# EAGLE board 13767_LiPoChargerBooster5V1A-panel_v10 (EAGLE 7.5.0), part 1 of 4
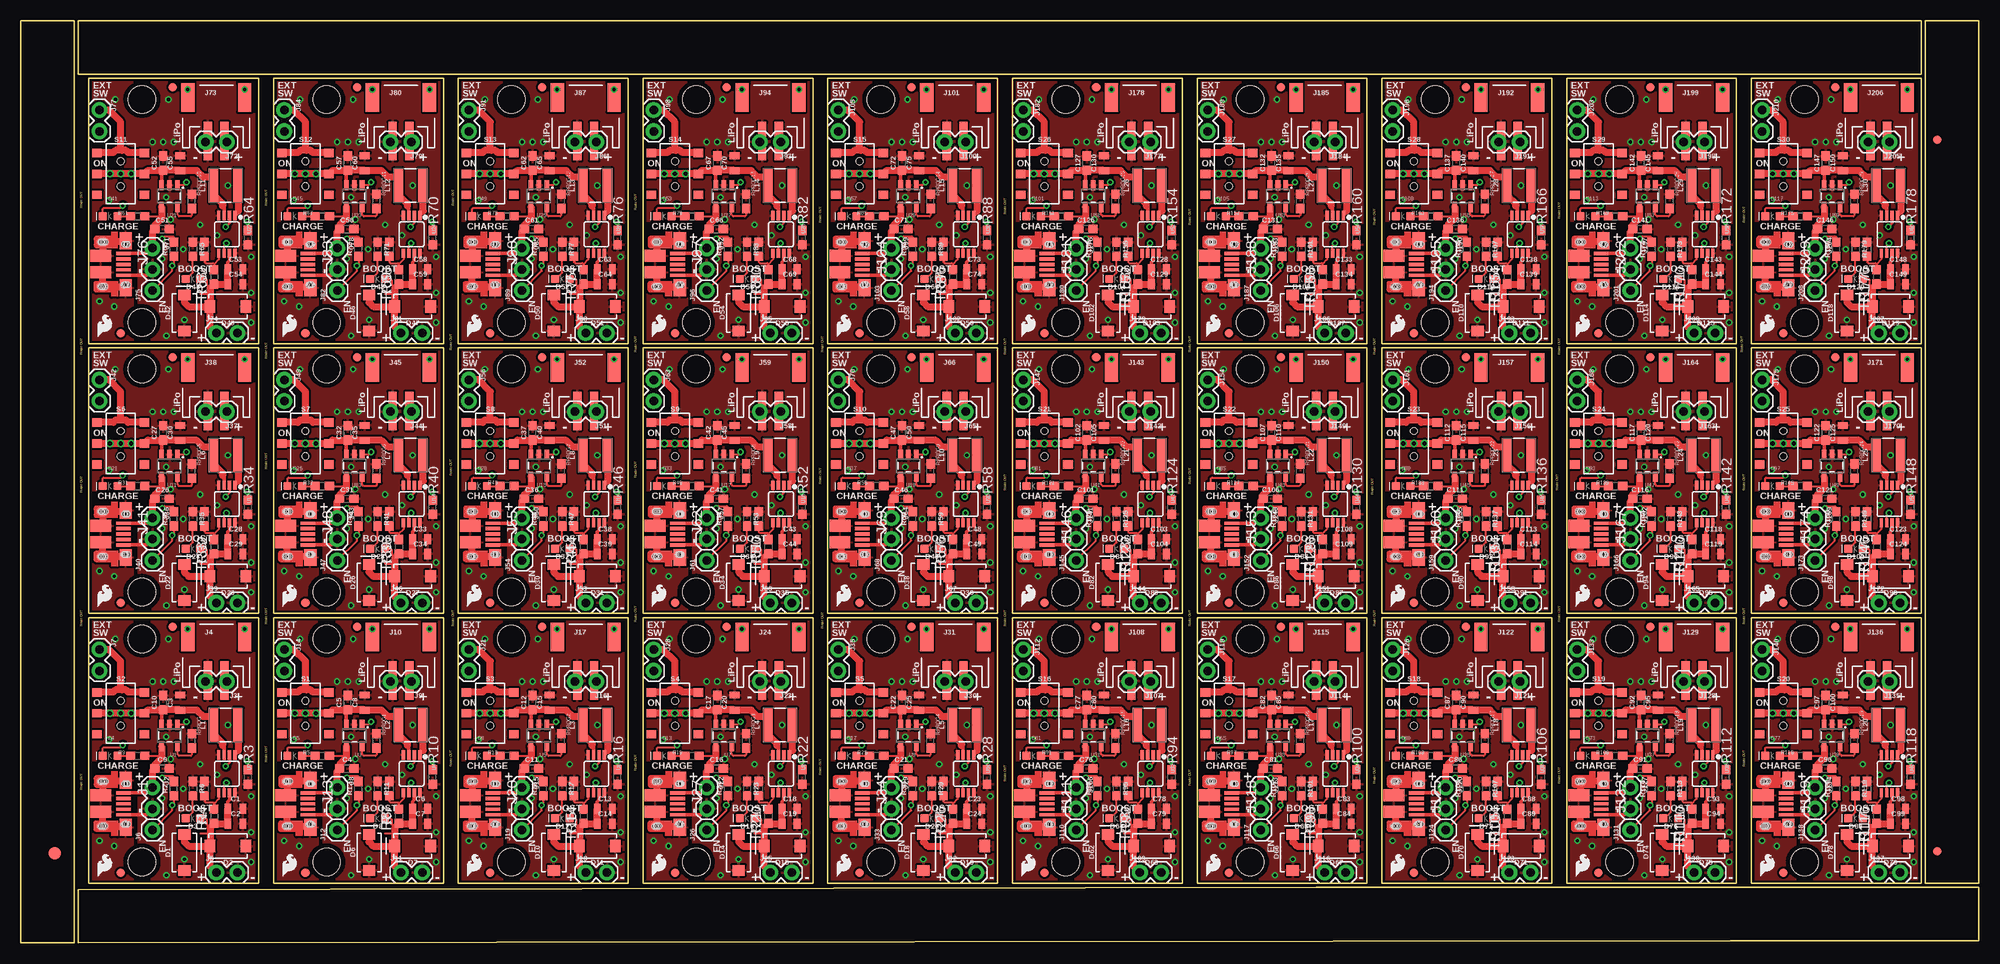
[diagram p0: board, top side]
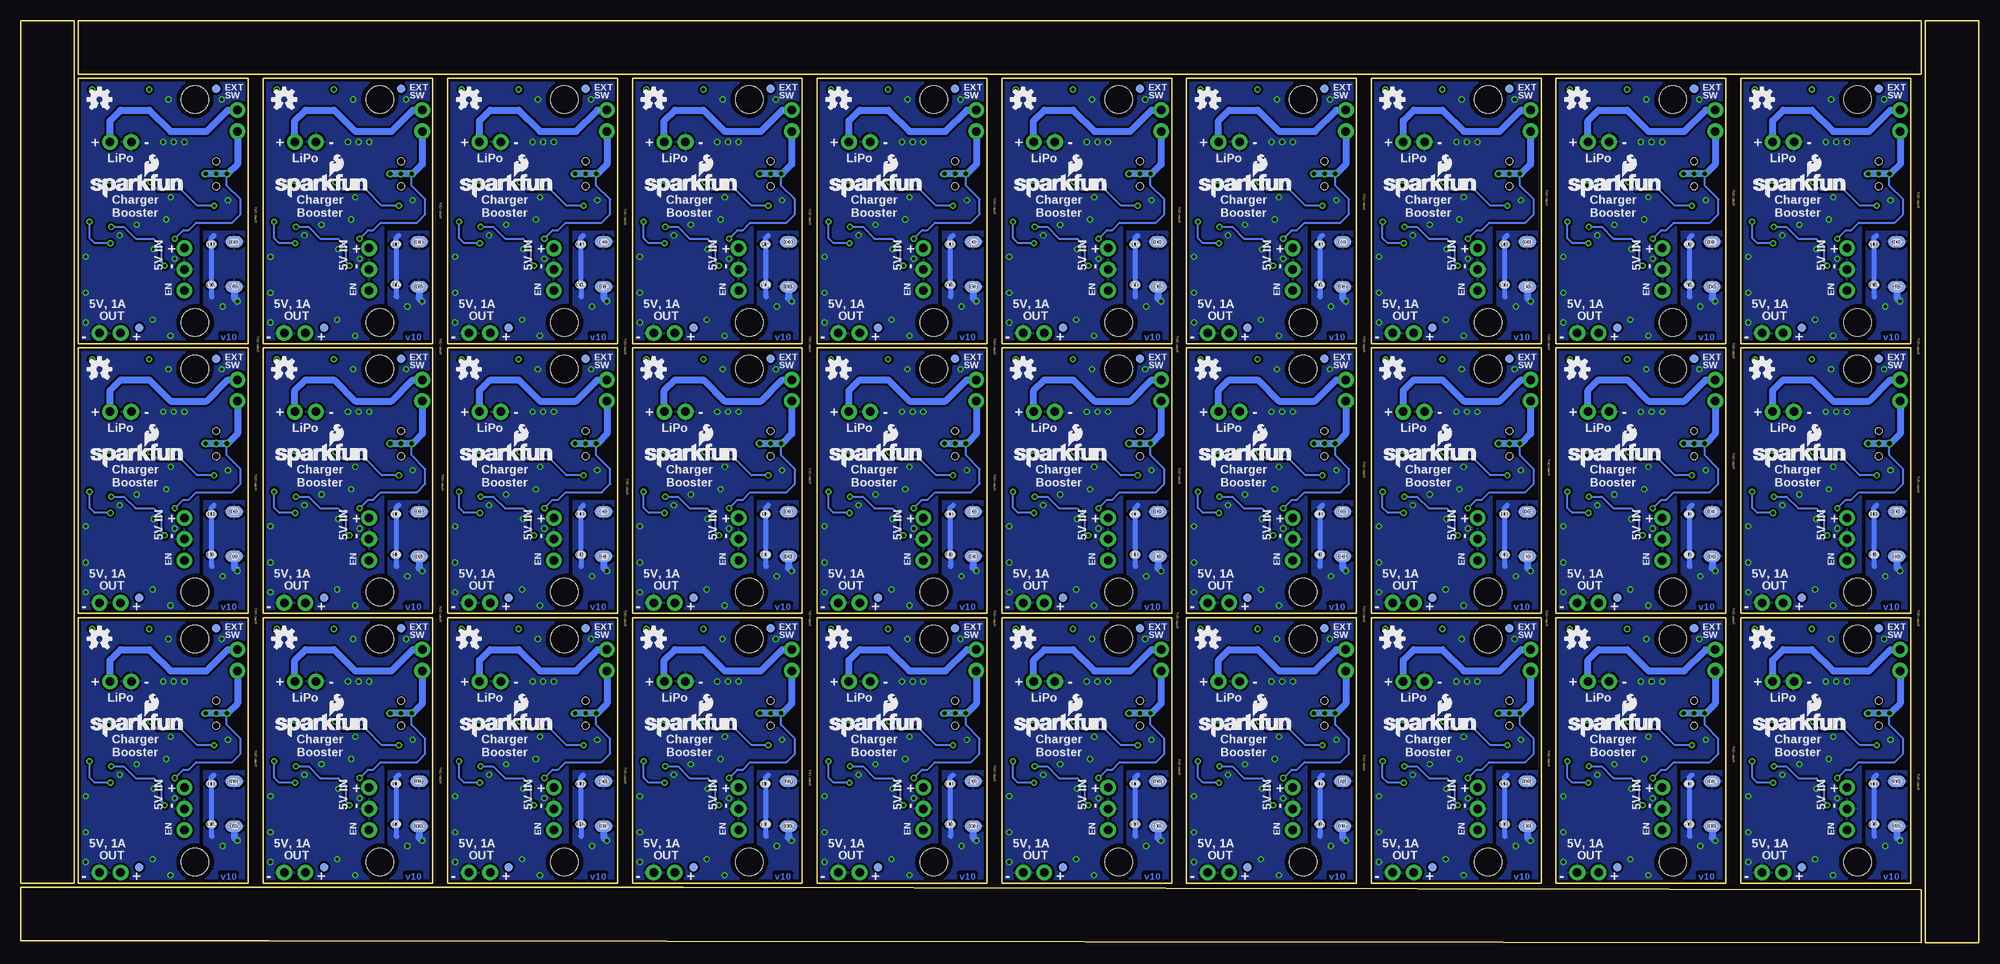
[diagram p1: board, bottom side, seen from below]

Size 234.19 x 110.24 mm. Coordinates in mm from the lower left corner, seen from the top.
Outline: 0,30.99 0,110.24 6.35,110.24 6.35,80.52
Outline: 6.35,83.06 6.35,0 0,0 0,33.53
Outline: 72.39,103.89 6.86,103.89 6.86,110.24 22.86,110.24
Outline: 20.32,110.24 227.33,110.24 227.33,103.89 69.85,103.89
Outline: 234.19,79.5 234.19,7.11 227.84,7.11 227.84,29.97
Outline: 227.84,27.43 227.84,110.24 234.19,110.24 234.19,76.96
Outline: 154.94,6.6 234.19,6.6 234.19,0.25 204.47,0.25
Outline: 207.01,0.25 6.86,0 6.86,6.35 157.48,6.6
Outline: 8.13,7.11 28.45,7.11 28.45,38.86 8.13,38.86 8.13,7.11
Outline: 30.23,7.11 50.55,7.11 50.55,38.86 30.23,38.86 30.23,7.11
Outline: 52.32,7.11 72.64,7.11 72.64,38.86 52.32,38.86 52.32,7.11
Outline: 74.42,7.11 94.74,7.11 94.74,38.86 74.42,38.86 74.42,7.11
Outline: 96.52,7.11 116.84,7.11 116.84,38.86 96.52,38.86 96.52,7.11
Outline: 8.13,39.37 28.45,39.37 28.45,71.12 8.13,71.12 8.13,39.37
Outline: 30.23,39.37 50.55,39.37 50.55,71.12 30.23,71.12 30.23,39.37
Outline: 52.32,39.37 72.64,39.37 72.64,71.12 52.32,71.12 52.32,39.37
Outline: 74.42,39.37 94.74,39.37 94.74,71.12 74.42,71.12 74.42,39.37
Outline: 96.52,39.37 116.84,39.37 116.84,71.12 96.52,71.12 96.52,39.37
Outline: 8.13,71.63 28.45,71.63 28.45,103.38 8.13,103.38 8.13,71.63
Outline: 30.23,71.63 50.55,71.63 50.55,103.38 30.23,103.38 30.23,71.63
Outline: 52.32,71.63 72.64,71.63 72.64,103.38 52.32,103.38 52.32,71.63
Outline: 74.42,71.63 94.74,71.63 94.74,103.38 74.42,103.38 74.42,71.63
Outline: 96.52,71.63 116.84,71.63 116.84,103.38 96.52,103.38 96.52,71.63
Outline: 118.62,7.11 138.94,7.11 138.94,38.86 118.62,38.86 118.62,7.11
Outline: 140.72,7.11 161.04,7.11 161.04,38.86 140.72,38.86 140.72,7.11
Outline: 162.81,7.11 183.13,7.11 183.13,38.86 162.81,38.86 162.81,7.11
Outline: 184.91,7.11 205.23,7.11 205.23,38.86 184.91,38.86 184.91,7.11
Outline: 207.01,7.11 227.33,7.11 227.33,38.86 207.01,38.86 207.01,7.11
Outline: 118.62,39.37 138.94,39.37 138.94,71.12 118.62,71.12 118.62,39.37
Outline: 140.72,39.37 161.04,39.37 161.04,71.12 140.72,71.12 140.72,39.37
Outline: 162.81,39.37 183.13,39.37 183.13,71.12 162.81,71.12 162.81,39.37
Outline: 184.91,39.37 205.23,39.37 205.23,71.12 184.91,71.12 184.91,39.37
Outline: 207.01,39.37 227.33,39.37 227.33,71.12 207.01,71.12 207.01,39.37
Outline: 118.62,71.63 138.94,71.63 138.94,103.38 118.62,103.38 118.62,71.63
Outline: 140.72,71.63 161.04,71.63 161.04,103.38 140.72,103.38 140.72,71.63
Outline: 162.81,71.63 183.13,71.63 183.13,103.38 162.81,103.38 162.81,71.63
Outline: 184.91,71.63 205.23,71.63 205.23,103.38 184.91,103.38 184.91,71.63
Outline: 207.01,71.63 227.33,71.63 227.33,103.38 207.01,103.38 207.01,71.63
Copper layers (1*16): Top 0.035mm / dielectric 1.5mm / Bottom 0.035mm
Design rules "SparkFun-2-layer-TIGHT": minimum track width 7mil, minimum drill 15mil, track to track 7mil, track to pad 7mil, pad to pad 7mil, via to via 7mil, smd to smd 7mil, copper to edge 7mil, drill to drill 7mil, minimum pad ring 7mil, minimum via ring 7mil, stop-mask expansion 4mil, vias tented up to drill 25mil, thermal gap 10mil
Net classes: 0 default: width 0.152 mm, drill 0.305 mm, clearance 0.152 mm

## Footprints (pad centres in the part's own frame; a part is rotated, then mirrored left to right if it is on the bottom)
0805 = smd 0.8 x 1.2: 1 -0.9,0; 2 0.9,0
0603 = smd 1.1 x 1: 1 -0.85,0; 2 0.85,0
SMA-DIODE = smd 1.27 x 1.47: A -2.15,0; C 2.15,0
LED-0603 = smd 1 x 1: A -0.877,0; C 0.877,0
FIDUCIAL-1.5X3 = smd 1.5 x 1.5: 1 0,0
FIDUCIAL-1X2 = smd 1 x 1: 1 0,0
USB-MICROB-PTH = smd 0.4 x 1.75: D+ 0.031,1.331; D- -0.619,1.331; GND 1.331,1.331; ID 0.681,1.331; VBUS -1.269,1.331 | smd 1.4 x 2.1 bottom: P$1 2.701,-1.142; P$3 -2.659,-1.144 | smd 1 x 1.3: P$2 2.487,1.594; P$6 -2.368,1.604 | smd 1 x 1.3 bottom: P$4 -2.368,1.604; P$10 2.481,1.598 | smd 1.1 x 1.5: P$8 2.701,-1.142; P$12 -2.659,-1.144 | smd 2 x 1.46: SHEILD2 2.831,1.606; SHIELD -2.794,1.606 | smd 1.425 x 2.5: SHIELD3 -0.979,-1.349; SHIELD4 0.996,-1.352 | hole 0.66: -2.659,-0.879; 2.477,1.821; 2.461,1.666; 2.481,1.426; 2.467,1.536; -2.659,-1.059; -2.659,-1.219; -2.649,-1.349; 2.701,-0.899; 2.701,-1.079; 2.701,-1.239; 2.711,-1.369; -2.369,1.821; -2.359,1.691; -2.369,1.541; -2.364,1.432
1X02 = drill 1.016 pad 1.88: 1 0,0; 2 2.54,0
JST-2-SMD = smd 1 x 4.6: 1 -1,-3.7; 2 1,-3.7 | smd 1.6 x 3.4: NC1 -3.4,1.5; NC2 3.4,1.5
1X01 = drill 1.016 pad 1.88: 1 0,0
STAND-OFF = hole 3.302: 0,0
INDUCTOR_4X4MM = smd 4.089 x 1.143: P$1 0,1.473; P$2 0,-1.473
SWITCH_DPDT_SMD_AYZ0202 = smd 1 x 1.15: 1 -2.5,2.825; 2 0,2.825; 3 2.5,2.825; 4 -2.5,-2.825; 5 0,-2.825; 6 2.5,-2.825 | hole 0.85: 1.5,0; -1.5,0
PAD.03X.03 = smd 0.762 x 0.762: P$1 0,0
SOT23-5 = smd 0.55 x 1.2: 1 -0.95,-1.3; 2 0,-1.3; 3 0.95,-1.3; 4 0.95,1.3; 5 -0.95,1.3
MSOP8 = smd 0.4 x 1.1: 1 -0.975,-2.25; 2 -0.325,-2.25; 3 0.325,-2.25; 4 0.975,-2.25; 5 0.975,2.25; 6 0.325,2.25; 7 -0.325,2.25; 8 -0.975,2.25

## Placement (x,y rotation side)
C1  22uF  [0805]  25.65,16 0 top
C2  22uF  [0805]  25.65,14.22 0 top
C3  22uF  [0805]  19.05,28.7 90 top
C4  4.7uF  [0603]  38.99,20.83 0 top
C5  4.7uF  [0603]  39.12,28.7 90 top
C6  22uF  [0805]  47.75,16 0 top
C7  22uF  [0805]  47.75,14.22 0 top
C8  22uF  [0805]  41.15,28.7 90 top
C9  4.7uF  [0603]  16.89,20.83 0 top
C10  4.7uF  [0603]  17.02,28.7 90 top
C11  4.7uF  [0603]  61.09,20.83 0 top
C12  4.7uF  [0603]  61.21,28.7 90 top
C13  22uF  [0805]  69.85,16 0 top
C14  22uF  [0805]  69.85,14.22 0 top
C15  22uF  [0805]  63.25,28.7 90 top
C16  4.7uF  [0603]  83.19,20.83 0 top
C17  4.7uF  [0603]  83.31,28.7 90 top
C18  22uF  [0805]  91.95,16 0 top
C19  22uF  [0805]  91.95,14.22 0 top
C20  22uF  [0805]  85.34,28.7 90 top
C21  4.7uF  [0603]  105.28,20.83 0 top
C22  4.7uF  [0603]  105.41,28.7 90 top
C23  22uF  [0805]  114.05,16 0 top
C24  22uF  [0805]  114.05,14.22 0 top
C25  22uF  [0805]  107.44,28.7 90 top
C26  4.7uF  [0603]  16.89,53.09 0 top
C27  4.7uF  [0603]  17.02,60.96 90 top
C28  22uF  [0805]  25.65,48.26 0 top
C29  22uF  [0805]  25.65,46.48 0 top
C30  22uF  [0805]  19.05,60.96 90 top
C31  4.7uF  [0603]  38.99,53.09 0 top
C32  4.7uF  [0603]  39.12,60.96 90 top
C33  22uF  [0805]  47.75,48.26 0 top
C34  22uF  [0805]  47.75,46.48 0 top
C35  22uF  [0805]  41.15,60.96 90 top
C36  4.7uF  [0603]  61.09,53.09 0 top
C37  4.7uF  [0603]  61.21,60.96 90 top
C38  22uF  [0805]  69.85,48.26 0 top
C39  22uF  [0805]  69.85,46.48 0 top
C40  22uF  [0805]  63.25,60.96 90 top
C41  4.7uF  [0603]  83.19,53.09 0 top
C42  4.7uF  [0603]  83.31,60.96 90 top
C43  22uF  [0805]  91.95,48.26 0 top
C44  22uF  [0805]  91.95,46.48 0 top
C45  22uF  [0805]  85.34,60.96 90 top
C46  4.7uF  [0603]  105.28,53.09 0 top
C47  4.7uF  [0603]  105.41,60.96 90 top
C48  22uF  [0805]  114.05,48.26 0 top
C49  22uF  [0805]  114.05,46.48 0 top
C50  22uF  [0805]  107.44,60.96 90 top
C51  4.7uF  [0603]  16.89,85.34 0 top
C52  4.7uF  [0603]  17.02,93.22 90 top
C53  22uF  [0805]  25.65,80.52 0 top
C54  22uF  [0805]  25.65,78.74 0 top
C55  22uF  [0805]  19.05,93.22 90 top
C56  4.7uF  [0603]  38.99,85.34 0 top
C57  4.7uF  [0603]  39.12,93.22 90 top
C58  22uF  [0805]  47.75,80.52 0 top
C59  22uF  [0805]  47.75,78.74 0 top
C60  22uF  [0805]  41.15,93.22 90 top
C61  4.7uF  [0603]  61.09,85.34 0 top
C62  4.7uF  [0603]  61.21,93.22 90 top
C63  22uF  [0805]  69.85,80.52 0 top
C64  22uF  [0805]  69.85,78.74 0 top
C65  22uF  [0805]  63.25,93.22 90 top
C66  4.7uF  [0603]  83.19,85.34 0 top
C67  4.7uF  [0603]  83.31,93.22 90 top
C68  22uF  [0805]  91.95,80.52 0 top
C69  22uF  [0805]  91.95,78.74 0 top
C70  22uF  [0805]  85.34,93.22 90 top
C71  4.7uF  [0603]  105.28,85.34 0 top
C72  4.7uF  [0603]  105.41,93.22 90 top
C73  22uF  [0805]  114.05,80.52 0 top
C74  22uF  [0805]  114.05,78.74 0 top
C75  22uF  [0805]  107.44,93.22 90 top
C76  4.7uF  [0603]  127.38,20.83 0 top
C77  4.7uF  [0603]  127.51,28.7 90 top
C78  22uF  [0805]  136.14,16 0 top
C79  22uF  [0805]  136.14,14.22 0 top
C80  22uF  [0805]  129.54,28.7 90 top
C81  4.7uF  [0603]  149.48,20.83 0 top
C82  4.7uF  [0603]  149.61,28.7 90 top
C83  22uF  [0805]  158.24,16 0 top
C84  22uF  [0805]  158.24,14.22 0 top
C85  22uF  [0805]  151.64,28.7 90 top
C86  4.7uF  [0603]  171.58,20.83 0 top
C87  4.7uF  [0603]  171.7,28.7 90 top
C88  22uF  [0805]  180.34,16 0 top
C89  22uF  [0805]  180.34,14.22 0 top
C90  22uF  [0805]  173.74,28.7 90 top
C91  4.7uF  [0603]  193.68,20.83 0 top
C92  4.7uF  [0603]  193.8,28.7 90 top
C93  22uF  [0805]  202.44,16 0 top
C94  22uF  [0805]  202.44,14.22 0 top
C95  22uF  [0805]  195.83,28.7 90 top
C96  4.7uF  [0603]  215.77,20.83 0 top
C97  4.7uF  [0603]  215.9,28.7 90 top
C98  22uF  [0805]  224.54,16 0 top
C99  22uF  [0805]  224.54,14.22 0 top
C100  22uF  [0805]  217.93,28.7 90 top
C101  4.7uF  [0603]  127.38,53.09 0 top
C102  4.7uF  [0603]  127.51,60.96 90 top
C103  22uF  [0805]  136.14,48.26 0 top
C104  22uF  [0805]  136.14,46.48 0 top
C105  22uF  [0805]  129.54,60.96 90 top
C106  4.7uF  [0603]  149.48,53.09 0 top
C107  4.7uF  [0603]  149.61,60.96 90 top
C108  22uF  [0805]  158.24,48.26 0 top
C109  22uF  [0805]  158.24,46.48 0 top
C110  22uF  [0805]  151.64,60.96 90 top
C111  4.7uF  [0603]  171.58,53.09 0 top
C112  4.7uF  [0603]  171.7,60.96 90 top
C113  22uF  [0805]  180.34,48.26 0 top
C114  22uF  [0805]  180.34,46.48 0 top
C115  22uF  [0805]  173.74,60.96 90 top
C116  4.7uF  [0603]  193.68,53.09 0 top
C117  4.7uF  [0603]  193.8,60.96 90 top
C118  22uF  [0805]  202.44,48.26 0 top
C119  22uF  [0805]  202.44,46.48 0 top
C120  22uF  [0805]  195.83,60.96 90 top
C121  4.7uF  [0603]  215.77,53.09 0 top
C122  4.7uF  [0603]  215.9,60.96 90 top
C123  22uF  [0805]  224.54,48.26 0 top
C124  22uF  [0805]  224.54,46.48 0 top
C125  22uF  [0805]  217.93,60.96 90 top
C126  4.7uF  [0603]  127.38,85.34 0 top
C127  4.7uF  [0603]  127.51,93.22 90 top
C128  22uF  [0805]  136.14,80.52 0 top
C129  22uF  [0805]  136.14,78.74 0 top
C130  22uF  [0805]  129.54,93.22 90 top
C131  4.7uF  [0603]  149.48,85.34 0 top
C132  4.7uF  [0603]  149.61,93.22 90 top
C133  22uF  [0805]  158.24,80.52 0 top
C134  22uF  [0805]  158.24,78.74 0 top
C135  22uF  [0805]  151.64,93.22 90 top
C136  4.7uF  [0603]  171.58,85.34 0 top
C137  4.7uF  [0603]  171.7,93.22 90 top
C138  22uF  [0805]  180.34,80.52 0 top
C139  22uF  [0805]  180.34,78.74 0 top
C140  22uF  [0805]  173.74,93.22 90 top
C141  4.7uF  [0603]  193.68,85.34 0 top
C142  4.7uF  [0603]  193.8,93.22 90 top
C143  22uF  [0805]  202.44,80.52 0 top
C144  22uF  [0805]  202.44,78.74 0 top
C145  22uF  [0805]  195.83,93.22 90 top
C146  4.7uF  [0603]  215.77,85.34 0 top
C147  4.7uF  [0603]  215.9,93.22 90 top
C148  22uF  [0805]  224.54,80.52 0 top
C149  22uF  [0805]  224.54,78.74 0 top
C150  22uF  [0805]  217.93,93.22 90 top
D1  3A/40V/500mV  [SMA-DIODE]  19.56,10.79 90 top
D2  3A/40V/500mV  [SMA-DIODE]  24.77,11.56 180 top
D3  RED  [LED-0603]  20.57,14.86 180 top
D4  BLUE  [LED-0603]  10.67,22.35 180 top
D5  BLUE  [LED-0603]  32.77,22.35 180 top
D6  3A/40V/500mV  [SMA-DIODE]  41.66,10.79 90 top
D7  3A/40V/500mV  [SMA-DIODE]  46.86,11.56 180 top
D8  RED  [LED-0603]  42.67,14.86 180 top
D9  BLUE  [LED-0603]  54.86,22.35 180 top
D10  3A/40V/500mV  [SMA-DIODE]  63.75,10.79 90 top
D11  3A/40V/500mV  [SMA-DIODE]  68.96,11.56 180 top
D12  RED  [LED-0603]  64.77,14.86 180 top
D13  BLUE  [LED-0603]  76.96,22.35 180 top
D14  3A/40V/500mV  [SMA-DIODE]  85.85,10.79 90 top
D15  3A/40V/500mV  [SMA-DIODE]  91.06,11.56 180 top
D16  RED  [LED-0603]  86.87,14.86 180 top
D17  BLUE  [LED-0603]  99.06,22.35 180 top
D18  3A/40V/500mV  [SMA-DIODE]  107.95,10.79 90 top
D19  3A/40V/500mV  [SMA-DIODE]  113.16,11.56 180 top
D20  RED  [LED-0603]  108.97,14.86 180 top
D21  BLUE  [LED-0603]  10.67,54.61 180 top
D22  3A/40V/500mV  [SMA-DIODE]  19.56,43.05 90 top
D23  3A/40V/500mV  [SMA-DIODE]  24.77,43.81 180 top
D24  RED  [LED-0603]  20.57,47.12 180 top
D25  BLUE  [LED-0603]  32.77,54.61 180 top
D26  3A/40V/500mV  [SMA-DIODE]  41.66,43.05 90 top
D27  3A/40V/500mV  [SMA-DIODE]  46.86,43.81 180 top
D28  RED  [LED-0603]  42.67,47.12 180 top
D29  BLUE  [LED-0603]  54.86,54.61 180 top
D30  3A/40V/500mV  [SMA-DIODE]  63.75,43.05 90 top
D31  3A/40V/500mV  [SMA-DIODE]  68.96,43.81 180 top
D32  RED  [LED-0603]  64.77,47.12 180 top
D33  BLUE  [LED-0603]  76.96,54.61 180 top
D34  3A/40V/500mV  [SMA-DIODE]  85.85,43.05 90 top
D35  3A/40V/500mV  [SMA-DIODE]  91.06,43.81 180 top
D36  RED  [LED-0603]  86.87,47.12 180 top
D37  BLUE  [LED-0603]  99.06,54.61 180 top
D38  3A/40V/500mV  [SMA-DIODE]  107.95,43.05 90 top
D39  3A/40V/500mV  [SMA-DIODE]  113.16,43.81 180 top
D40  RED  [LED-0603]  108.97,47.12 180 top
D41  BLUE  [LED-0603]  10.67,86.87 180 top
D42  3A/40V/500mV  [SMA-DIODE]  19.56,75.31 90 top
D43  3A/40V/500mV  [SMA-DIODE]  24.77,76.07 180 top
D44  RED  [LED-0603]  20.57,79.38 180 top
D45  BLUE  [LED-0603]  32.77,86.87 180 top
D46  3A/40V/500mV  [SMA-DIODE]  41.66,75.31 90 top
D47  3A/40V/500mV  [SMA-DIODE]  46.86,76.07 180 top
D48  RED  [LED-0603]  42.67,79.38 180 top
D49  BLUE  [LED-0603]  54.86,86.87 180 top
D50  3A/40V/500mV  [SMA-DIODE]  63.75,75.31 90 top
D51  3A/40V/500mV  [SMA-DIODE]  68.96,76.07 180 top
D52  RED  [LED-0603]  64.77,79.38 180 top
D53  BLUE  [LED-0603]  76.96,86.87 180 top
D54  3A/40V/500mV  [SMA-DIODE]  85.85,75.31 90 top
D55  3A/40V/500mV  [SMA-DIODE]  91.06,76.07 180 top
D56  RED  [LED-0603]  86.87,79.38 180 top
D57  BLUE  [LED-0603]  99.06,86.87 180 top
D58  3A/40V/500mV  [SMA-DIODE]  107.95,75.31 90 top
D59  3A/40V/500mV  [SMA-DIODE]  113.16,76.07 180 top
D60  RED  [LED-0603]  108.97,79.38 180 top
D61  BLUE  [LED-0603]  121.16,22.35 180 top
D62  3A/40V/500mV  [SMA-DIODE]  130.05,10.79 90 top
D63  3A/40V/500mV  [SMA-DIODE]  135.25,11.56 180 top
D64  RED  [LED-0603]  131.06,14.86 180 top
D65  BLUE  [LED-0603]  143.26,22.35 180 top
D66  3A/40V/500mV  [SMA-DIODE]  152.15,10.79 90 top
D67  3A/40V/500mV  [SMA-DIODE]  157.35,11.56 180 top
D68  RED  [LED-0603]  153.16,14.86 180 top
D69  BLUE  [LED-0603]  165.35,22.35 180 top
D70  3A/40V/500mV  [SMA-DIODE]  174.24,10.79 90 top
D71  3A/40V/500mV  [SMA-DIODE]  179.45,11.56 180 top
D72  RED  [LED-0603]  175.26,14.86 180 top
D73  BLUE  [LED-0603]  187.45,22.35 180 top
D74  3A/40V/500mV  [SMA-DIODE]  196.34,10.79 90 top
D75  3A/40V/500mV  [SMA-DIODE]  201.55,11.56 180 top
D76  RED  [LED-0603]  197.36,14.86 180 top
D77  BLUE  [LED-0603]  209.55,22.35 180 top
D78  3A/40V/500mV  [SMA-DIODE]  218.44,10.79 90 top
D79  3A/40V/500mV  [SMA-DIODE]  223.65,11.56 180 top
D80  RED  [LED-0603]  219.46,14.86 180 top
D81  BLUE  [LED-0603]  121.16,54.61 180 top
D82  3A/40V/500mV  [SMA-DIODE]  130.05,43.05 90 top
D83  3A/40V/500mV  [SMA-DIODE]  135.25,43.81 180 top
D84  RED  [LED-0603]  131.06,47.12 180 top
D85  BLUE  [LED-0603]  143.26,54.61 180 top
D86  3A/40V/500mV  [SMA-DIODE]  152.15,43.05 90 top
D87  3A/40V/500mV  [SMA-DIODE]  157.35,43.81 180 top
D88  RED  [LED-0603]  153.16,47.12 180 top
D89  BLUE  [LED-0603]  165.35,54.61 180 top
D90  3A/40V/500mV  [SMA-DIODE]  174.24,43.05 90 top
D91  3A/40V/500mV  [SMA-DIODE]  179.45,43.81 180 top
D92  RED  [LED-0603]  175.26,47.12 180 top
D93  BLUE  [LED-0603]  187.45,54.61 180 top
D94  3A/40V/500mV  [SMA-DIODE]  196.34,43.05 90 top
D95  3A/40V/500mV  [SMA-DIODE]  201.55,43.81 180 top
D96  RED  [LED-0603]  197.36,47.12 180 top
D97  BLUE  [LED-0603]  209.55,54.61 180 top
D98  3A/40V/500mV  [SMA-DIODE]  218.44,43.05 90 top
D99  3A/40V/500mV  [SMA-DIODE]  223.65,43.81 180 top
D100  RED  [LED-0603]  219.46,47.12 180 top
D101  BLUE  [LED-0603]  121.16,86.87 180 top
D102  3A/40V/500mV  [SMA-DIODE]  130.05,75.31 90 top
D103  3A/40V/500mV  [SMA-DIODE]  135.25,76.07 180 top
D104  RED  [LED-0603]  131.06,79.38 180 top
D105  BLUE  [LED-0603]  143.26,86.87 180 top
D106  3A/40V/500mV  [SMA-DIODE]  152.15,75.31 90 top
D107  3A/40V/500mV  [SMA-DIODE]  157.35,76.07 180 top
D108  RED  [LED-0603]  153.16,79.38 180 top
D109  BLUE  [LED-0603]  165.35,86.87 180 top
D110  3A/40V/500mV  [SMA-DIODE]  174.24,75.31 90 top
D111  3A/40V/500mV  [SMA-DIODE]  179.45,76.07 180 top
D112  RED  [LED-0603]  175.26,79.38 180 top
D113  BLUE  [LED-0603]  187.45,86.87 180 top
D114  3A/40V/500mV  [SMA-DIODE]  196.34,75.31 90 top
D115  3A/40V/500mV  [SMA-DIODE]  201.55,76.07 180 top
D116  RED  [LED-0603]  197.36,79.38 180 top
D117  BLUE  [LED-0603]  209.55,86.87 180 top
D118  3A/40V/500mV  [SMA-DIODE]  218.44,75.31 90 top
D119  3A/40V/500mV  [SMA-DIODE]  223.65,76.07 180 top
D120  RED  [LED-0603]  219.46,79.38 180 top
E$1  [FIDUCIAL-1.5X3]  4.06,10.67 0 top
E$5  [FIDUCIAL-1X2]  229.24,10.92 0 top
E$6  [FIDUCIAL-1X2]  229.24,96.01 180 top
J1  AMP FCI 10103594-0001LF  [USB-MICROB-PTH]  10.92,16.64 270 top
J2  PTH  [1X02]  15.75,18.54 270 top
J3  PTH  [1X02]  24.64,31.24 180 top
J4  JST  [JST-2-SMD]  23.37,35.05 0 top
J5  [1X02]  23.37,8.38 0 top
J6  [1X01]  15.75,13.46 90 top
J7  PTH  [1X02]  9.4,35.05 270 top
J8  PTH  [1X02]  37.85,18.54 270 top
J9  PTH  [1X02]  46.74,31.24 180 top
J10  JST  [JST-2-SMD]  45.47,35.05 0 top
J11  [1X02]  45.47,8.38 0 top
J12  [1X01]  37.85,13.46 90 top
J13  AMP FCI 10103594-0001LF  [USB-MICROB-PTH]  33.02,16.64 270 top
J14  PTH  [1X02]  31.5,35.05 270 top
J15  PTH  [1X02]  59.94,18.54 270 top
J16  PTH  [1X02]  68.83,31.24 180 top
J17  JST  [JST-2-SMD]  67.56,35.05 0 top
J18  [1X02]  67.56,8.38 0 top
J19  [1X01]  59.94,13.46 90 top
J20  AMP FCI 10103594-0001LF  [USB-MICROB-PTH]  55.12,16.64 270 top
J21  PTH  [1X02]  53.59,35.05 270 top
J22  PTH  [1X02]  82.04,18.54 270 top
J23  PTH  [1X02]  90.93,31.24 180 top
J24  JST  [JST-2-SMD]  89.66,35.05 0 top
J25  [1X02]  89.66,8.38 0 top
J26  [1X01]  82.04,13.46 90 top
J27  AMP FCI 10103594-0001LF  [USB-MICROB-PTH]  77.22,16.64 270 top
J28  PTH  [1X02]  75.69,35.05 270 top
J29  PTH  [1X02]  104.14,18.54 270 top
J30  PTH  [1X02]  113.03,31.24 180 top
J31  JST  [JST-2-SMD]  111.76,35.05 0 top
J32  [1X02]  111.76,8.38 0 top
J33  [1X01]  104.14,13.46 90 top
J34  AMP FCI 10103594-0001LF  [USB-MICROB-PTH]  99.31,16.64 270 top
J35  PTH  [1X02]  97.79,35.05 270 top
J36  PTH  [1X02]  15.75,50.8 270 top
J37  PTH  [1X02]  24.64,63.5 180 top
J38  JST  [JST-2-SMD]  23.37,67.31 0 top
J39  [1X02]  23.37,40.64 0 top
J40  [1X01]  15.75,45.72 90 top
J41  AMP FCI 10103594-0001LF  [USB-MICROB-PTH]  10.92,48.9 270 top
J42  PTH  [1X02]  9.4,67.31 270 top
J43  PTH  [1X02]  37.85,50.8 270 top
J44  PTH  [1X02]  46.74,63.5 180 top
J45  JST  [JST-2-SMD]  45.47,67.31 0 top
J46  [1X02]  45.47,40.64 0 top
J47  [1X01]  37.85,45.72 90 top
J48  AMP FCI 10103594-0001LF  [USB-MICROB-PTH]  33.02,48.9 270 top
J49  PTH  [1X02]  31.5,67.31 270 top
J50  PTH  [1X02]  59.94,50.8 270 top
J51  PTH  [1X02]  68.83,63.5 180 top
J52  JST  [JST-2-SMD]  67.56,67.31 0 top
J53  [1X02]  67.56,40.64 0 top
J54  [1X01]  59.94,45.72 90 top
J55  AMP FCI 10103594-0001LF  [USB-MICROB-PTH]  55.12,48.9 270 top
J56  PTH  [1X02]  53.59,67.31 270 top
J57  PTH  [1X02]  82.04,50.8 270 top
J58  PTH  [1X02]  90.93,63.5 180 top
J59  JST  [JST-2-SMD]  89.66,67.31 0 top
J60  [1X02]  89.66,40.64 0 top
J61  [1X01]  82.04,45.72 90 top
J62  AMP FCI 10103594-0001LF  [USB-MICROB-PTH]  77.22,48.9 270 top
J63  PTH  [1X02]  75.69,67.31 270 top
J64  PTH  [1X02]  104.14,50.8 270 top
J65  PTH  [1X02]  113.03,63.5 180 top
J66  JST  [JST-2-SMD]  111.76,67.31 0 top
J67  [1X02]  111.76,40.64 0 top
J68  [1X01]  104.14,45.72 90 top
J69  AMP FCI 10103594-0001LF  [USB-MICROB-PTH]  99.31,48.9 270 top
J70  PTH  [1X02]  97.79,67.31 270 top
J71  PTH  [1X02]  15.75,83.06 270 top
J72  PTH  [1X02]  24.64,95.76 180 top
J73  JST  [JST-2-SMD]  23.37,99.57 0 top
J74  [1X02]  23.37,72.9 0 top
J75  [1X01]  15.75,77.98 90 top
J76  AMP FCI 10103594-0001LF  [USB-MICROB-PTH]  10.92,81.15 270 top
J77  PTH  [1X02]  9.4,99.57 270 top
J78  PTH  [1X02]  37.85,83.06 270 top
J79  PTH  [1X02]  46.74,95.76 180 top
J80  JST  [JST-2-SMD]  45.47,99.57 0 top
J81  [1X02]  45.47,72.9 0 top
J82  [1X01]  37.85,77.98 90 top
J83  AMP FCI 10103594-0001LF  [USB-MICROB-PTH]  33.02,81.15 270 top
J84  PTH  [1X02]  31.5,99.57 270 top
J85  PTH  [1X02]  59.94,83.06 270 top
J86  PTH  [1X02]  68.83,95.76 180 top
J87  JST  [JST-2-SMD]  67.56,99.57 0 top
J88  [1X02]  67.56,72.9 0 top
J89  [1X01]  59.94,77.98 90 top
J90  AMP FCI 10103594-0001LF  [USB-MICROB-PTH]  55.12,81.15 270 top
J91  PTH  [1X02]  53.59,99.57 270 top
J92  PTH  [1X02]  82.04,83.06 270 top
J93  PTH  [1X02]  90.93,95.76 180 top
J94  JST  [JST-2-SMD]  89.66,99.57 0 top
J95  [1X02]  89.66,72.9 0 top
J96  [1X01]  82.04,77.98 90 top
J97  AMP FCI 10103594-0001LF  [USB-MICROB-PTH]  77.22,81.15 270 top
J98  PTH  [1X02]  75.69,99.57 270 top
J99  PTH  [1X02]  104.14,83.06 270 top
J100  PTH  [1X02]  113.03,95.76 180 top
J101  JST  [JST-2-SMD]  111.76,99.57 0 top
J102  [1X02]  111.76,72.9 0 top
J103  [1X01]  104.14,77.98 90 top
J104  AMP FCI 10103594-0001LF  [USB-MICROB-PTH]  99.31,81.15 270 top
J105  PTH  [1X02]  97.79,99.57 270 top
J106  PTH  [1X02]  126.24,18.54 270 top
J107  PTH  [1X02]  135.13,31.24 180 top
J108  JST  [JST-2-SMD]  133.86,35.05 0 top
J109  [1X02]  133.86,8.38 0 top
J110  [1X01]  126.24,13.46 90 top
J111  AMP FCI 10103594-0001LF  [USB-MICROB-PTH]  121.41,16.64 270 top
J112  PTH  [1X02]  119.89,35.05 270 top
J113  PTH  [1X02]  148.34,18.54 270 top
J114  PTH  [1X02]  157.23,31.24 180 top
J115  JST  [JST-2-SMD]  155.96,35.05 0 top
J116  [1X02]  155.96,8.38 0 top
J117  [1X01]  148.34,13.46 90 top
J118  AMP FCI 10103594-0001LF  [USB-MICROB-PTH]  143.51,16.64 270 top
J119  PTH  [1X02]  141.99,35.05 270 top
J120  PTH  [1X02]  170.43,18.54 270 top
J121  PTH  [1X02]  179.32,31.24 180 top
J122  JST  [JST-2-SMD]  178.05,35.05 0 top
J123  [1X02]  178.05,8.38 0 top
J124  [1X01]  170.43,13.46 90 top
J125  AMP FCI 10103594-0001LF  [USB-MICROB-PTH]  165.61,16.64 270 top
J126  PTH  [1X02]  164.08,35.05 270 top
J127  PTH  [1X02]  192.53,18.54 270 top
J128  PTH  [1X02]  201.42,31.24 180 top
J129  JST  [JST-2-SMD]  200.15,35.05 0 top
J130  [1X02]  200.15,8.38 0 top
J131  [1X01]  192.53,13.46 90 top
J132  AMP FCI 10103594-0001LF  [USB-MICROB-PTH]  187.71,16.64 270 top
J133  PTH  [1X02]  186.18,35.05 270 top
J134  PTH  [1X02]  214.63,18.54 270 top
J135  PTH  [1X02]  223.52,31.24 180 top
J136  JST  [JST-2-SMD]  222.25,35.05 0 top
J137  [1X02]  222.25,8.38 0 top
J138  [1X01]  214.63,13.46 90 top
J139  AMP FCI 10103594-0001LF  [USB-MICROB-PTH]  209.8,16.64 270 top
J140  PTH  [1X02]  208.28,35.05 270 top
J141  PTH  [1X02]  126.24,50.8 270 top
J142  PTH  [1X02]  135.13,63.5 180 top
J143  JST  [JST-2-SMD]  133.86,67.31 0 top
J144  [1X02]  133.86,40.64 0 top
J145  [1X01]  126.24,45.72 90 top
J146  AMP FCI 10103594-0001LF  [USB-MICROB-PTH]  121.41,48.9 270 top
J147  PTH  [1X02]  119.89,67.31 270 top
J148  PTH  [1X02]  148.34,50.8 270 top
J149  PTH  [1X02]  157.23,63.5 180 top
J150  JST  [JST-2-SMD]  155.96,67.31 0 top
J151  [1X02]  155.96,40.64 0 top
J152  [1X01]  148.34,45.72 90 top
J153  AMP FCI 10103594-0001LF  [USB-MICROB-PTH]  143.51,48.9 270 top
J154  PTH  [1X02]  141.99,67.31 270 top
J155  PTH  [1X02]  170.43,50.8 270 top
J156  PTH  [1X02]  179.32,63.5 180 top
J157  JST  [JST-2-SMD]  178.05,67.31 0 top
J158  [1X02]  178.05,40.64 0 top
J159  [1X01]  170.43,45.72 90 top
J160  AMP FCI 10103594-0001LF  [USB-MICROB-PTH]  165.61,48.9 270 top
J161  PTH  [1X02]  164.08,67.31 270 top
J162  PTH  [1X02]  192.53,50.8 270 top
J163  PTH  [1X02]  201.42,63.5 180 top
J164  JST  [JST-2-SMD]  200.15,67.31 0 top
J165  [1X02]  200.15,40.64 0 top
J166  [1X01]  192.53,45.72 90 top
J167  AMP FCI 10103594-0001LF  [USB-MICROB-PTH]  187.71,48.9 270 top
J168  PTH  [1X02]  186.18,67.31 270 top
J169  PTH  [1X02]  214.63,50.8 270 top
J170  PTH  [1X02]  223.52,63.5 180 top
J171  JST  [JST-2-SMD]  222.25,67.31 0 top
J172  [1X02]  222.25,40.64 0 top
J173  [1X01]  214.63,45.72 90 top
J174  AMP FCI 10103594-0001LF  [USB-MICROB-PTH]  209.8,48.9 270 top
J175  PTH  [1X02]  208.28,67.31 270 top
J176  PTH  [1X02]  126.24,83.06 270 top
J177  PTH  [1X02]  135.13,95.76 180 top
J178  JST  [JST-2-SMD]  133.86,99.57 0 top
J179  [1X02]  133.86,72.9 0 top
J180  [1X01]  126.24,77.98 90 top
J181  AMP FCI 10103594-0001LF  [USB-MICROB-PTH]  121.41,81.15 270 top
J182  PTH  [1X02]  119.89,99.57 270 top
J183  PTH  [1X02]  148.34,83.06 270 top
J184  PTH  [1X02]  157.23,95.76 180 top
J185  JST  [JST-2-SMD]  155.96,99.57 0 top
J186  [1X02]  155.96,72.9 0 top
J187  [1X01]  148.34,77.98 90 top
J188  AMP FCI 10103594-0001LF  [USB-MICROB-PTH]  143.51,81.15 270 top
J189  PTH  [1X02]  141.99,99.57 270 top
J190  PTH  [1X02]  170.43,83.06 270 top
J191  PTH  [1X02]  179.32,95.76 180 top
J192  JST  [JST-2-SMD]  178.05,99.57 0 top
J193  [1X02]  178.05,72.9 0 top
J194  [1X01]  170.43,77.98 90 top
J195  AMP FCI 10103594-0001LF  [USB-MICROB-PTH]  165.61,81.15 270 top
J196  PTH  [1X02]  164.08,99.57 270 top
J197  PTH  [1X02]  192.53,83.06 270 top
J198  PTH  [1X02]  201.42,95.76 180 top
J199  JST  [JST-2-SMD]  200.15,99.57 0 top
J200  [1X02]  200.15,72.9 0 top
J201  [1X01]  192.53,77.98 90 top
J202  AMP FCI 10103594-0001LF  [USB-MICROB-PTH]  187.71,81.15 270 top
J203  PTH  [1X02]  186.18,99.57 270 top
J204  PTH  [1X02]  214.63,83.06 270 top
J205  PTH  [1X02]  223.52,95.76 180 top
J206  JST  [JST-2-SMD]  222.25,99.57 0 top
J207  [1X02]  222.25,72.9 0 top
J208  [1X01]  214.63,77.98 90 top
J209  AMP FCI 10103594-0001LF  [USB-MICROB-PTH]  209.8,81.15 270 top
J210  PTH  [1X02]  208.28,99.57 270 top
JP1  FIDUCIAL1X2  [FIDUCIAL-1X2]  11.94,37.59 0 bottom
JP2  FIDUCIAL1X2  [FIDUCIAL-1X2]  11.94,8.38 0 top
JP3  SFE_LOGO_NAME_FLAME.1_INCH  [SFE_LOGO_NAME_FLAME_.1]  27.35,24.5 0 bottom
JP4  FIDUCIAL1X2  [FIDUCIAL-1X2]  21.15,9.02 0 bottom
JP5  SFE_LOGO_NAME_FLAME.1_INCH  [SFE_LOGO_NAME_FLAME_.1]  49.45,24.5 0 bottom
JP6  STAND-OFF  [STAND-OFF]  14.48,9.65 0 top
JP7  STAND-OFF  [STAND-OFF]  14.48,36.32 0 top
JP8  STAND-OFF  [STAND-OFF]  36.58,9.65 0 top
JP9  STAND-OFF  [STAND-OFF]  36.58,36.32 0 top
JP10  FIDUCIAL1X2  [FIDUCIAL-1X2]  40.24,37.77 0 top
JP11  FIDUCIAL1X2  [FIDUCIAL-1X2]  34.04,8.38 0 top
JP12  FIDUCIAL1X2  [FIDUCIAL-1X2]  34.04,37.59 0 bottom
JP13  FIDUCIAL1X2  [FIDUCIAL-1X2]  43.24,9.02 0 bottom
JP14  SFE_LOGO_NAME_FLAME.1_INCH  [SFE_LOGO_NAME_FLAME_.1]  71.55,24.5 0 bottom
JP15  STAND-OFF  [STAND-OFF]  58.67,9.65 0 top
JP16  FIDUCIAL1X2  [FIDUCIAL-1X2]  18.15,37.77 0 top
JP17  STAND-OFF  [STAND-OFF]  58.67,36.32 0 top
JP18  FIDUCIAL1X2  [FIDUCIAL-1X2]  62.34,37.77 0 top
JP19  FIDUCIAL1X2  [FIDUCIAL-1X2]  56.13,8.38 0 top
JP20  FIDUCIAL1X2  [FIDUCIAL-1X2]  56.13,37.59 0 bottom
JP21  FIDUCIAL1X2  [FIDUCIAL-1X2]  65.34,9.02 0 bottom
JP22  SFE_LOGO_NAME_FLAME.1_INCH  [SFE_LOGO_NAME_FLAME_.1]  93.65,24.5 0 bottom
JP23  STAND-OFF  [STAND-OFF]  80.77,9.65 0 top
JP24  STAND-OFF  [STAND-OFF]  80.77,36.32 0 top
JP25  FIDUCIAL1X2  [FIDUCIAL-1X2]  84.44,37.77 0 top
JP26  FIDUCIAL1X2  [FIDUCIAL-1X2]  78.23,8.38 0 top
JP27  FIDUCIAL1X2  [FIDUCIAL-1X2]  78.23,37.59 0 bottom
JP28  FIDUCIAL1X2  [FIDUCIAL-1X2]  87.44,9.02 0 bottom
JP29  SFE_LOGO_NAME_FLAME.1_INCH  [SFE_LOGO_NAME_FLAME_.1]  115.74,24.5 0 bottom
JP30  STAND-OFF  [STAND-OFF]  102.87,9.65 0 top
JP31  STAND-OFF  [STAND-OFF]  102.87,36.32 0 top
JP32  FIDUCIAL1X2  [FIDUCIAL-1X2]  106.54,37.77 0 top
JP33  FIDUCIAL1X2  [FIDUCIAL-1X2]  100.33,8.38 0 top
JP34  FIDUCIAL1X2  [FIDUCIAL-1X2]  100.33,37.59 0 bottom
JP35  FIDUCIAL1X2  [FIDUCIAL-1X2]  109.54,9.02 0 bottom
JP36  SFE_LOGO_NAME_FLAME.1_INCH  [SFE_LOGO_NAME_FLAME_.1]  27.35,56.76 0 bottom
JP37  STAND-OFF  [STAND-OFF]  14.48,41.91 0 top
JP38  STAND-OFF  [STAND-OFF]  14.48,68.58 0 top
JP39  FIDUCIAL1X2  [FIDUCIAL-1X2]  18.15,70.02 0 top
JP40  FIDUCIAL1X2  [FIDUCIAL-1X2]  11.94,40.64 0 top
JP41  FIDUCIAL1X2  [FIDUCIAL-1X2]  11.94,69.85 0 bottom
JP42  FIDUCIAL1X2  [FIDUCIAL-1X2]  21.15,41.27 0 bottom
JP43  SFE_LOGO_NAME_FLAME.1_INCH  [SFE_LOGO_NAME_FLAME_.1]  49.45,56.76 0 bottom
JP44  STAND-OFF  [STAND-OFF]  36.58,41.91 0 top
JP45  STAND-OFF  [STAND-OFF]  36.58,68.58 0 top
JP46  FIDUCIAL1X2  [FIDUCIAL-1X2]  40.24,70.02 0 top
JP47  FIDUCIAL1X2  [FIDUCIAL-1X2]  34.04,40.64 0 top
JP48  FIDUCIAL1X2  [FIDUCIAL-1X2]  34.04,69.85 0 bottom
JP49  FIDUCIAL1X2  [FIDUCIAL-1X2]  43.24,41.27 0 bottom
JP50  SFE_LOGO_NAME_FLAME.1_INCH  [SFE_LOGO_NAME_FLAME_.1]  71.55,56.76 0 bottom
JP51  STAND-OFF  [STAND-OFF]  58.67,41.91 0 top
JP52  STAND-OFF  [STAND-OFF]  58.67,68.58 0 top
JP53  FIDUCIAL1X2  [FIDUCIAL-1X2]  62.34,70.02 0 top
JP54  FIDUCIAL1X2  [FIDUCIAL-1X2]  56.13,40.64 0 top
JP55  FIDUCIAL1X2  [FIDUCIAL-1X2]  56.13,69.85 0 bottom
JP56  FIDUCIAL1X2  [FIDUCIAL-1X2]  65.34,41.27 0 bottom
JP57  SFE_LOGO_NAME_FLAME.1_INCH  [SFE_LOGO_NAME_FLAME_.1]  93.65,56.76 0 bottom
JP58  STAND-OFF  [STAND-OFF]  80.77,41.91 0 top
JP59  STAND-OFF  [STAND-OFF]  80.77,68.58 0 top
JP60  FIDUCIAL1X2  [FIDUCIAL-1X2]  84.44,70.02 0 top
JP61  FIDUCIAL1X2  [FIDUCIAL-1X2]  78.23,40.64 0 top
JP62  FIDUCIAL1X2  [FIDUCIAL-1X2]  78.23,69.85 0 bottom
JP63  FIDUCIAL1X2  [FIDUCIAL-1X2]  87.44,41.27 0 bottom
JP64  SFE_LOGO_NAME_FLAME.1_INCH  [SFE_LOGO_NAME_FLAME_.1]  115.74,56.76 0 bottom
JP65  STAND-OFF  [STAND-OFF]  102.87,41.91 0 top
JP66  STAND-OFF  [STAND-OFF]  102.87,68.58 0 top
JP67  FIDUCIAL1X2  [FIDUCIAL-1X2]  106.54,70.02 0 top
JP68  FIDUCIAL1X2  [FIDUCIAL-1X2]  100.33,40.64 0 top
JP69  FIDUCIAL1X2  [FIDUCIAL-1X2]  100.33,69.85 0 bottom
JP70  FIDUCIAL1X2  [FIDUCIAL-1X2]  109.54,41.27 0 bottom
JP71  SFE_LOGO_NAME_FLAME.1_INCH  [SFE_LOGO_NAME_FLAME_.1]  27.35,89.02 0 bottom
JP72  STAND-OFF  [STAND-OFF]  14.48,74.17 0 top
JP73  STAND-OFF  [STAND-OFF]  14.48,100.84 0 top
JP74  FIDUCIAL1X2  [FIDUCIAL-1X2]  18.15,102.28 0 top
JP75  FIDUCIAL1X2  [FIDUCIAL-1X2]  11.94,72.9 0 top
JP76  FIDUCIAL1X2  [FIDUCIAL-1X2]  11.94,102.11 0 bottom
JP77  FIDUCIAL1X2  [FIDUCIAL-1X2]  21.15,73.53 0 bottom
JP78  SFE_LOGO_NAME_FLAME.1_INCH  [SFE_LOGO_NAME_FLAME_.1]  49.45,89.02 0 bottom
JP79  STAND-OFF  [STAND-OFF]  36.58,74.17 0 top
JP80  STAND-OFF  [STAND-OFF]  36.58,100.84 0 top
JP81  FIDUCIAL1X2  [FIDUCIAL-1X2]  40.24,102.28 0 top
JP82  FIDUCIAL1X2  [FIDUCIAL-1X2]  34.04,72.9 0 top
JP83  FIDUCIAL1X2  [FIDUCIAL-1X2]  34.04,102.11 0 bottom
JP84  FIDUCIAL1X2  [FIDUCIAL-1X2]  43.24,73.53 0 bottom
JP85  SFE_LOGO_NAME_FLAME.1_INCH  [SFE_LOGO_NAME_FLAME_.1]  71.55,89.02 0 bottom
JP86  STAND-OFF  [STAND-OFF]  58.67,74.17 0 top
JP87  STAND-OFF  [STAND-OFF]  58.67,100.84 0 top
JP88  FIDUCIAL1X2  [FIDUCIAL-1X2]  62.34,102.28 0 top
JP89  FIDUCIAL1X2  [FIDUCIAL-1X2]  56.13,72.9 0 top
JP90  FIDUCIAL1X2  [FIDUCIAL-1X2]  56.13,102.11 0 bottom
JP91  FIDUCIAL1X2  [FIDUCIAL-1X2]  65.34,73.53 0 bottom
JP92  SFE_LOGO_NAME_FLAME.1_INCH  [SFE_LOGO_NAME_FLAME_.1]  93.65,89.02 0 bottom
JP93  STAND-OFF  [STAND-OFF]  80.77,74.17 0 top
JP94  STAND-OFF  [STAND-OFF]  80.77,100.84 0 top
JP95  FIDUCIAL1X2  [FIDUCIAL-1X2]  84.44,102.28 0 top
JP96  FIDUCIAL1X2  [FIDUCIAL-1X2]  78.23,72.9 0 top
JP97  FIDUCIAL1X2  [FIDUCIAL-1X2]  78.23,102.11 0 bottom
JP98  FIDUCIAL1X2  [FIDUCIAL-1X2]  87.44,73.53 0 bottom
JP99  SFE_LOGO_NAME_FLAME.1_INCH  [SFE_LOGO_NAME_FLAME_.1]  115.74,89.02 0 bottom
JP100  STAND-OFF  [STAND-OFF]  102.87,74.17 0 top
JP101  STAND-OFF  [STAND-OFF]  102.87,100.84 0 top
JP102  FIDUCIAL1X2  [FIDUCIAL-1X2]  106.54,102.28 0 top
JP103  FIDUCIAL1X2  [FIDUCIAL-1X2]  100.33,72.9 0 top
JP104  FIDUCIAL1X2  [FIDUCIAL-1X2]  100.33,102.11 0 bottom
JP105  FIDUCIAL1X2  [FIDUCIAL-1X2]  109.54,73.53 0 bottom
JP106  SFE_LOGO_NAME_FLAME.1_INCH  [SFE_LOGO_NAME_FLAME_.1]  137.84,24.5 0 bottom
JP107  STAND-OFF  [STAND-OFF]  124.97,9.65 0 top
JP108  STAND-OFF  [STAND-OFF]  124.97,36.32 0 top
JP109  FIDUCIAL1X2  [FIDUCIAL-1X2]  128.64,37.77 0 top
JP110  FIDUCIAL1X2  [FIDUCIAL-1X2]  122.43,8.38 0 top
JP111  FIDUCIAL1X2  [FIDUCIAL-1X2]  122.43,37.59 0 bottom
JP112  FIDUCIAL1X2  [FIDUCIAL-1X2]  131.64,9.02 0 bottom
JP113  SFE_LOGO_NAME_FLAME.1_INCH  [SFE_LOGO_NAME_FLAME_.1]  159.94,24.5 0 bottom
JP114  STAND-OFF  [STAND-OFF]  147.07,9.65 0 top
JP115  STAND-OFF  [STAND-OFF]  147.07,36.32 0 top
JP116  FIDUCIAL1X2  [FIDUCIAL-1X2]  150.73,37.77 0 top
JP117  FIDUCIAL1X2  [FIDUCIAL-1X2]  144.53,8.38 0 top
JP118  FIDUCIAL1X2  [FIDUCIAL-1X2]  144.53,37.59 0 bottom
JP119  FIDUCIAL1X2  [FIDUCIAL-1X2]  153.73,9.02 0 bottom
JP120  SFE_LOGO_NAME_FLAME.1_INCH  [SFE_LOGO_NAME_FLAME_.1]  182.04,24.5 0 bottom
JP121  STAND-OFF  [STAND-OFF]  169.16,9.65 0 top
JP122  STAND-OFF  [STAND-OFF]  169.16,36.32 0 top
JP123  FIDUCIAL1X2  [FIDUCIAL-1X2]  172.83,37.77 0 top
JP124  FIDUCIAL1X2  [FIDUCIAL-1X2]  166.62,8.38 0 top
JP125  FIDUCIAL1X2  [FIDUCIAL-1X2]  166.62,37.59 0 bottom
JP126  FIDUCIAL1X2  [FIDUCIAL-1X2]  175.83,9.02 0 bottom
JP127  SFE_LOGO_NAME_FLAME.1_INCH  [SFE_LOGO_NAME_FLAME_.1]  204.14,24.5 0 bottom
JP128  STAND-OFF  [STAND-OFF]  191.26,9.65 0 top
JP129  STAND-OFF  [STAND-OFF]  191.26,36.32 0 top
JP130  FIDUCIAL1X2  [FIDUCIAL-1X2]  194.93,37.77 0 top
JP131  FIDUCIAL1X2  [FIDUCIAL-1X2]  188.72,8.38 0 top
JP132  FIDUCIAL1X2  [FIDUCIAL-1X2]  188.72,37.59 0 bottom
JP133  FIDUCIAL1X2  [FIDUCIAL-1X2]  197.93,9.02 0 bottom
JP134  SFE_LOGO_NAME_FLAME.1_INCH  [SFE_LOGO_NAME_FLAME_.1]  226.23,24.5 0 bottom
JP135  STAND-OFF  [STAND-OFF]  213.36,9.65 0 top
JP136  STAND-OFF  [STAND-OFF]  213.36,36.32 0 top
JP137  FIDUCIAL1X2  [FIDUCIAL-1X2]  217.03,37.77 0 top
JP138  FIDUCIAL1X2  [FIDUCIAL-1X2]  210.82,8.38 0 top
JP139  FIDUCIAL1X2  [FIDUCIAL-1X2]  210.82,37.59 0 bottom
JP140  FIDUCIAL1X2  [FIDUCIAL-1X2]  220.03,9.02 0 bottom
JP141  SFE_LOGO_NAME_FLAME.1_INCH  [SFE_LOGO_NAME_FLAME_.1]  137.84,56.76 0 bottom
JP142  STAND-OFF  [STAND-OFF]  124.97,41.91 0 top
JP143  STAND-OFF  [STAND-OFF]  124.97,68.58 0 top
JP144  FIDUCIAL1X2  [FIDUCIAL-1X2]  128.64,70.02 0 top
JP145  FIDUCIAL1X2  [FIDUCIAL-1X2]  122.43,40.64 0 top
JP146  FIDUCIAL1X2  [FIDUCIAL-1X2]  122.43,69.85 0 bottom
JP147  FIDUCIAL1X2  [FIDUCIAL-1X2]  131.64,41.27 0 bottom
JP148  SFE_LOGO_NAME_FLAME.1_INCH  [SFE_LOGO_NAME_FLAME_.1]  159.94,56.76 0 bottom
JP149  STAND-OFF  [STAND-OFF]  147.07,41.91 0 top
JP150  STAND-OFF  [STAND-OFF]  147.07,68.58 0 top
JP151  FIDUCIAL1X2  [FIDUCIAL-1X2]  150.73,70.02 0 top
JP152  FIDUCIAL1X2  [FIDUCIAL-1X2]  144.53,40.64 0 top
JP153  FIDUCIAL1X2  [FIDUCIAL-1X2]  144.53,69.85 0 bottom
JP154  FIDUCIAL1X2  [FIDUCIAL-1X2]  153.73,41.27 0 bottom
JP155  SFE_LOGO_NAME_FLAME.1_INCH  [SFE_LOGO_NAME_FLAME_.1]  182.04,56.76 0 bottom
JP156  STAND-OFF  [STAND-OFF]  169.16,41.91 0 top
JP157  STAND-OFF  [STAND-OFF]  169.16,68.58 0 top
JP158  FIDUCIAL1X2  [FIDUCIAL-1X2]  172.83,70.02 0 top
JP159  FIDUCIAL1X2  [FIDUCIAL-1X2]  166.62,40.64 0 top
JP160  FIDUCIAL1X2  [FIDUCIAL-1X2]  166.62,69.85 0 bottom
JP161  FIDUCIAL1X2  [FIDUCIAL-1X2]  175.83,41.27 0 bottom
JP162  SFE_LOGO_NAME_FLAME.1_INCH  [SFE_LOGO_NAME_FLAME_.1]  204.14,56.76 0 bottom
JP163  STAND-OFF  [STAND-OFF]  191.26,41.91 0 top
JP164  STAND-OFF  [STAND-OFF]  191.26,68.58 0 top
JP165  FIDUCIAL1X2  [FIDUCIAL-1X2]  194.93,70.02 0 top
JP166  FIDUCIAL1X2  [FIDUCIAL-1X2]  188.72,40.64 0 top
JP167  FIDUCIAL1X2  [FIDUCIAL-1X2]  188.72,69.85 0 bottom
JP168  FIDUCIAL1X2  [FIDUCIAL-1X2]  197.93,41.27 0 bottom
JP169  SFE_LOGO_NAME_FLAME.1_INCH  [SFE_LOGO_NAME_FLAME_.1]  226.23,56.76 0 bottom
JP170  STAND-OFF  [STAND-OFF]  213.36,41.91 0 top
JP171  STAND-OFF  [STAND-OFF]  213.36,68.58 0 top
JP172  FIDUCIAL1X2  [FIDUCIAL-1X2]  217.03,70.02 0 top
JP173  FIDUCIAL1X2  [FIDUCIAL-1X2]  210.82,40.64 0 top
JP174  FIDUCIAL1X2  [FIDUCIAL-1X2]  210.82,69.85 0 bottom
JP175  FIDUCIAL1X2  [FIDUCIAL-1X2]  220.03,41.27 0 bottom
JP176  SFE_LOGO_NAME_FLAME.1_INCH  [SFE_LOGO_NAME_FLAME_.1]  137.84,89.02 0 bottom
JP177  STAND-OFF  [STAND-OFF]  124.97,74.17 0 top
JP178  STAND-OFF  [STAND-OFF]  124.97,100.84 0 top
JP179  FIDUCIAL1X2  [FIDUCIAL-1X2]  128.64,102.28 0 top
JP180  FIDUCIAL1X2  [FIDUCIAL-1X2]  122.43,72.9 0 top
JP181  FIDUCIAL1X2  [FIDUCIAL-1X2]  122.43,102.11 0 bottom
JP182  FIDUCIAL1X2  [FIDUCIAL-1X2]  131.64,73.53 0 bottom
JP183  SFE_LOGO_NAME_FLAME.1_INCH  [SFE_LOGO_NAME_FLAME_.1]  159.94,89.02 0 bottom
JP184  STAND-OFF  [STAND-OFF]  147.07,74.17 0 top
JP185  STAND-OFF  [STAND-OFF]  147.07,100.84 0 top
JP186  FIDUCIAL1X2  [FIDUCIAL-1X2]  150.73,102.28 0 top
JP187  FIDUCIAL1X2  [FIDUCIAL-1X2]  144.53,72.9 0 top
JP188  FIDUCIAL1X2  [FIDUCIAL-1X2]  144.53,102.11 0 bottom
JP189  FIDUCIAL1X2  [FIDUCIAL-1X2]  153.73,73.53 0 bottom
JP190  SFE_LOGO_NAME_FLAME.1_INCH  [SFE_LOGO_NAME_FLAME_.1]  182.04,89.02 0 bottom
JP191  STAND-OFF  [STAND-OFF]  169.16,74.17 0 top
JP192  STAND-OFF  [STAND-OFF]  169.16,100.84 0 top
JP193  FIDUCIAL1X2  [FIDUCIAL-1X2]  172.83,102.28 0 top
JP194  FIDUCIAL1X2  [FIDUCIAL-1X2]  166.62,72.9 0 top
JP195  FIDUCIAL1X2  [FIDUCIAL-1X2]  166.62,102.11 0 bottom
JP196  FIDUCIAL1X2  [FIDUCIAL-1X2]  175.83,73.53 0 bottom
JP197  SFE_LOGO_NAME_FLAME.1_INCH  [SFE_LOGO_NAME_FLAME_.1]  204.14,89.02 0 bottom
JP198  STAND-OFF  [STAND-OFF]  191.26,74.17 0 top
JP199  STAND-OFF  [STAND-OFF]  191.26,100.84 0 top
JP200  FIDUCIAL1X2  [FIDUCIAL-1X2]  194.93,102.28 0 top
JP201  FIDUCIAL1X2  [FIDUCIAL-1X2]  188.72,72.9 0 top
JP202  FIDUCIAL1X2  [FIDUCIAL-1X2]  188.72,102.11 0 bottom
JP203  FIDUCIAL1X2  [FIDUCIAL-1X2]  197.93,73.53 0 bottom
JP204  SFE_LOGO_NAME_FLAME.1_INCH  [SFE_LOGO_NAME_FLAME_.1]  226.23,89.02 0 bottom
JP205  STAND-OFF  [STAND-OFF]  213.36,74.17 0 top
JP206  STAND-OFF  [STAND-OFF]  213.36,100.84 0 top
JP207  FIDUCIAL1X2  [FIDUCIAL-1X2]  217.03,102.28 0 top
JP208  FIDUCIAL1X2  [FIDUCIAL-1X2]  210.82,72.9 0 top
JP209  FIDUCIAL1X2  [FIDUCIAL-1X2]  210.82,102.11 0 bottom
JP210  FIDUCIAL1X2  [FIDUCIAL-1X2]  220.03,73.53 0 bottom
L1  2.2UH3A  [INDUCTOR_4X4MM]  24.51,26.04 90 top
L2  2.2UH3A  [INDUCTOR_4X4MM]  46.61,26.04 90 top
L3  2.2UH3A  [INDUCTOR_4X4MM]  68.71,26.04 90 top
L4  2.2UH3A  [INDUCTOR_4X4MM]  90.81,26.04 90 top
L5  2.2UH3A  [INDUCTOR_4X4MM]  112.9,26.04 90 top
L6  2.2UH3A  [INDUCTOR_4X4MM]  24.51,58.29 90 top
L7  2.2UH3A  [INDUCTOR_4X4MM]  46.61,58.29 90 top
L8  2.2UH3A  [INDUCTOR_4X4MM]  68.71,58.29 90 top
L9  2.2UH3A  [INDUCTOR_4X4MM]  90.81,58.29 90 top
L10  2.2UH3A  [INDUCTOR_4X4MM]  112.9,58.29 90 top
L11  2.2UH3A  [INDUCTOR_4X4MM]  24.51,90.55 90 top
L12  2.2UH3A  [INDUCTOR_4X4MM]  46.61,90.55 90 top
L13  2.2UH3A  [INDUCTOR_4X4MM]  68.71,90.55 90 top
L14  2.2UH3A  [INDUCTOR_4X4MM]  90.81,90.55 90 top
L15  2.2UH3A  [INDUCTOR_4X4MM]  112.9,90.55 90 top
L16  2.2UH3A  [INDUCTOR_4X4MM]  135,26.04 90 top
L17  2.2UH3A  [INDUCTOR_4X4MM]  157.1,26.04 90 top
L18  2.2UH3A  [INDUCTOR_4X4MM]  179.2,26.04 90 top
L19  2.2UH3A  [INDUCTOR_4X4MM]  201.29,26.04 90 top
L20  2.2UH3A  [INDUCTOR_4X4MM]  223.39,26.04 90 top
L21  2.2UH3A  [INDUCTOR_4X4MM]  135,58.29 90 top
L22  2.2UH3A  [INDUCTOR_4X4MM]  157.1,58.29 90 top
L23  2.2UH3A  [INDUCTOR_4X4MM]  179.2,58.29 90 top
L24  2.2UH3A  [INDUCTOR_4X4MM]  201.29,58.29 90 top
L25  2.2UH3A  [INDUCTOR_4X4MM]  223.39,58.29 90 top
L26  2.2UH3A  [INDUCTOR_4X4MM]  135,90.55 90 top
L27  2.2UH3A  [INDUCTOR_4X4MM]  157.1,90.55 90 top
L28  2.2UH3A  [INDUCTOR_4X4MM]  179.2,90.55 90 top
L29  2.2UH3A  [INDUCTOR_4X4MM]  201.29,90.55 90 top
L30  2.2UH3A  [INDUCTOR_4X4MM]  223.39,90.55 90 top
LOGO1  SFE_LOGO_FLAME.1_INCH  [SFE_LOGO_FLAME_.1]  8.89,7.62 0 top
LOGO2  SFE_LOGO_FLAME.1_INCH  [SFE_LOGO_FLAME_.1]  30.99,7.62 0 top
LOGO3  SFE_LOGO_FLAME.1_INCH  [SFE_LOGO_FLAME_.1]  53.09,7.62 0 top
LOGO4  SFE_LOGO_FLAME.1_INCH  [SFE_LOGO_FLAME_.1]  75.18,7.62 0 top
LOGO5  SFE_LOGO_FLAME.1_INCH  [SFE_LOGO_FLAME_.1]  97.28,7.62 0 top
LOGO6  SFE_LOGO_FLAME.1_INCH  [SFE_LOGO_FLAME_.1]  8.89,39.88 0 top
LOGO7  SFE_LOGO_FLAME.1_INCH  [SFE_LOGO_FLAME_.1]  30.99,39.88 0 top
LOGO8  SFE_LOGO_FLAME.1_INCH  [SFE_LOGO_FLAME_.1]  53.09,39.88 0 top
LOGO9  SFE_LOGO_FLAME.1_INCH  [SFE_LOGO_FLAME_.1]  75.18,39.88 0 top
LOGO10  SFE_LOGO_FLAME.1_INCH  [SFE_LOGO_FLAME_.1]  97.28,39.88 0 top
LOGO11  SFE_LOGO_FLAME.1_INCH  [SFE_LOGO_FLAME_.1]  8.89,72.14 0 top
LOGO12  SFE_LOGO_FLAME.1_INCH  [SFE_LOGO_FLAME_.1]  30.99,72.14 0 top
LOGO13  SFE_LOGO_FLAME.1_INCH  [SFE_LOGO_FLAME_.1]  53.09,72.14 0 top
LOGO14  SFE_LOGO_FLAME.1_INCH  [SFE_LOGO_FLAME_.1]  75.18,72.14 0 top
LOGO15  SFE_LOGO_FLAME.1_INCH  [SFE_LOGO_FLAME_.1]  97.28,72.14 0 top
LOGO16  SFE_LOGO_FLAME.1_INCH  [SFE_LOGO_FLAME_.1]  119.38,7.62 0 top
LOGO17  SFE_LOGO_FLAME.1_INCH  [SFE_LOGO_FLAME_.1]  141.48,7.62 0 top
LOGO18  SFE_LOGO_FLAME.1_INCH  [SFE_LOGO_FLAME_.1]  163.58,7.62 0 top
LOGO19  SFE_LOGO_FLAME.1_INCH  [SFE_LOGO_FLAME_.1]  185.67,7.62 0 top
LOGO20  SFE_LOGO_FLAME.1_INCH  [SFE_LOGO_FLAME_.1]  207.77,7.62 0 top
LOGO21  SFE_LOGO_FLAME.1_INCH  [SFE_LOGO_FLAME_.1]  119.38,39.88 0 top
LOGO22  SFE_LOGO_FLAME.1_INCH  [SFE_LOGO_FLAME_.1]  141.48,39.88 0 top
LOGO23  SFE_LOGO_FLAME.1_INCH  [SFE_LOGO_FLAME_.1]  163.58,39.88 0 top
LOGO24  SFE_LOGO_FLAME.1_INCH  [SFE_LOGO_FLAME_.1]  185.67,39.88 0 top
LOGO25  SFE_LOGO_FLAME.1_INCH  [SFE_LOGO_FLAME_.1]  207.77,39.88 0 top
LOGO26  SFE_LOGO_FLAME.1_INCH  [SFE_LOGO_FLAME_.1]  119.38,72.14 0 top
LOGO27  SFE_LOGO_FLAME.1_INCH  [SFE_LOGO_FLAME_.1]  141.48,72.14 0 top
LOGO28  SFE_LOGO_FLAME.1_INCH  [SFE_LOGO_FLAME_.1]  163.58,72.14 0 top
LOGO29  SFE_LOGO_FLAME.1_INCH  [SFE_LOGO_FLAME_.1]  185.67,72.14 0 top
LOGO30  SFE_LOGO_FLAME.1_INCH  [SFE_LOGO_FLAME_.1]  207.77,72.14 0 top
R1  100k  [0603]  21.97,18.41 270 top
R2  10k  [0603]  18.29,18.41 90 top
R3  DNP  [0603]  27.18,19.81 90 top
R4  750K  [0603]  23.11,15.11 270 top
R5  1k  [0603]  36.07,22.35 0 top
R6  4.7k  [0603]  20.57,18.41 270 top
R7  750K  [0603]  45.21,15.11 270 top
R8  100k  [0603]  44.07,18.41 270 top
R9  1k  [0603]  13.97,22.35 0 top
R10  DNP  [0603]  49.28,19.81 90 top
R11  4.7k  [0603]  42.67,18.41 270 top
R12  10k  [0603]  40.39,18.41 90 top
R13  1k  [0603]  58.17,22.35 0 top
R14  750K  [0603]  67.31,15.11 270 top
R15  100k  [0603]  66.17,18.41 270 top
R16  DNP  [0603]  71.37,19.81 90 top
R17  4.7k  [0603]  64.77,18.41 270 top
R18  10k  [0603]  62.48,18.41 90 top
R19  1k  [0603]  80.26,22.35 0 top
R20  750K  [0603]  89.41,15.11 270 top
R21  100k  [0603]  88.27,18.41 270 top
R22  DNP  [0603]  93.47,19.81 90 top
R23  4.7k  [0603]  86.87,18.41 270 top
R24  10k  [0603]  84.58,18.41 90 top
R25  1k  [0603]  102.36,22.35 0 top
R26  750K  [0603]  111.51,15.11 270 top
R27  100k  [0603]  110.36,18.41 270 top
R28  DNP  [0603]  115.57,19.81 90 top
R29  4.7k  [0603]  108.97,18.41 270 top
R30  10k  [0603]  106.68,18.41 90 top
R31  1k  [0603]  13.97,54.61 0 top
R32  750K  [0603]  23.11,47.37 270 top
R33  100k  [0603]  21.97,50.67 270 top
R34  DNP  [0603]  27.18,52.07 90 top
R35  4.7k  [0603]  20.57,50.67 270 top
R36  10k  [0603]  18.29,50.67 90 top
R37  1k  [0603]  36.07,54.61 0 top
R38  750K  [0603]  45.21,47.37 270 top
R39  100k  [0603]  44.07,50.67 270 top
R40  DNP  [0603]  49.28,52.07 90 top
R41  4.7k  [0603]  42.67,50.67 270 top
R42  10k  [0603]  40.39,50.67 90 top
R43  1k  [0603]  58.17,54.61 0 top
R44  750K  [0603]  67.31,47.37 270 top
R45  100k  [0603]  66.17,50.67 270 top
R46  DNP  [0603]  71.37,52.07 90 top
R47  4.7k  [0603]  64.77,50.67 270 top
R48  10k  [0603]  62.48,50.67 90 top
R49  1k  [0603]  80.26,54.61 0 top
R50  750K  [0603]  89.41,47.37 270 top
R51  100k  [0603]  88.27,50.67 270 top
R52  DNP  [0603]  93.47,52.07 90 top
R53  4.7k  [0603]  86.87,50.67 270 top
R54  10k  [0603]  84.58,50.67 90 top
R55  1k  [0603]  102.36,54.61 0 top
R56  750K  [0603]  111.51,47.37 270 top
R57  100k  [0603]  110.36,50.67 270 top
R58  DNP  [0603]  115.57,52.07 90 top
R59  4.7k  [0603]  108.97,50.67 270 top
R60  10k  [0603]  106.68,50.67 90 top
R61  1k  [0603]  13.97,86.87 0 top
R62  750K  [0603]  23.11,79.63 270 top
R63  100k  [0603]  21.97,82.93 270 top
R64  DNP  [0603]  27.18,84.33 90 top
R65  4.7k  [0603]  20.57,82.93 270 top
R66  10k  [0603]  18.29,82.93 90 top
R67  1k  [0603]  36.07,86.87 0 top
R68  750K  [0603]  45.21,79.63 270 top
R69  100k  [0603]  44.07,82.93 270 top
R70  DNP  [0603]  49.28,84.33 90 top
R71  4.7k  [0603]  42.67,82.93 270 top
R72  10k  [0603]  40.39,82.93 90 top
R73  1k  [0603]  58.17,86.87 0 top
R74  750K  [0603]  67.31,79.63 270 top
R75  100k  [0603]  66.17,82.93 270 top
R76  DNP  [0603]  71.37,84.33 90 top
R77  4.7k  [0603]  64.77,82.93 270 top
R78  10k  [0603]  62.48,82.93 90 top
R79  1k  [0603]  80.26,86.87 0 top
R80  750K  [0603]  89.41,79.63 270 top
R81  100k  [0603]  88.27,82.93 270 top
R82  DNP  [0603]  93.47,84.33 90 top
R83  4.7k  [0603]  86.87,82.93 270 top
R84  10k  [0603]  84.58,82.93 90 top
R85  1k  [0603]  102.36,86.87 0 top
R86  750K  [0603]  111.51,79.63 270 top
R87  100k  [0603]  110.36,82.93 270 top
R88  DNP  [0603]  115.57,84.33 90 top
R89  4.7k  [0603]  108.97,82.93 270 top
R90  10k  [0603]  106.68,82.93 90 top
R91  1k  [0603]  124.46,22.35 0 top
R92  750K  [0603]  133.6,15.11 270 top
R93  100k  [0603]  132.46,18.41 270 top
R94  DNP  [0603]  137.67,19.81 90 top
R95  4.7k  [0603]  131.06,18.41 270 top
R96  10k  [0603]  128.78,18.41 90 top
R97  1k  [0603]  146.56,22.35 0 top
R98  750K  [0603]  155.7,15.11 270 top
R99  100k  [0603]  154.56,18.41 270 top
R100  DNP  [0603]  159.77,19.81 90 top
R101  4.7k  [0603]  153.16,18.41 270 top
R102  10k  [0603]  150.88,18.41 90 top
R103  1k  [0603]  168.66,22.35 0 top
R104  750K  [0603]  177.8,15.11 270 top
R105  100k  [0603]  176.66,18.41 270 top
R106  DNP  [0603]  181.86,19.81 90 top
R107  4.7k  [0603]  175.26,18.41 270 top
R108  10k  [0603]  172.97,18.41 90 top
R109  1k  [0603]  190.75,22.35 0 top
R110  750K  [0603]  199.9,15.11 270 top
R111  100k  [0603]  198.75,18.41 270 top
R112  DNP  [0603]  203.96,19.81 90 top
R113  4.7k  [0603]  197.36,18.41 270 top
R114  10k  [0603]  195.07,18.41 90 top
R115  1k  [0603]  212.85,22.35 0 top
R116  750K  [0603]  222,15.11 270 top
R117  100k  [0603]  220.85,18.41 270 top
R118  DNP  [0603]  226.06,19.81 90 top
R119  4.7k  [0603]  219.46,18.41 270 top
R120  10k  [0603]  217.17,18.41 90 top
R121  1k  [0603]  124.46,54.61 0 top
R122  750K  [0603]  133.6,47.37 270 top
R123  100k  [0603]  132.46,50.67 270 top
R124  DNP  [0603]  137.67,52.07 90 top
R125  4.7k  [0603]  131.06,50.67 270 top
R126  10k  [0603]  128.78,50.67 90 top
R127  1k  [0603]  146.56,54.61 0 top
R128  750K  [0603]  155.7,47.37 270 top
R129  100k  [0603]  154.56,50.67 270 top
R130  DNP  [0603]  159.77,52.07 90 top
R131  4.7k  [0603]  153.16,50.67 270 top
R132  10k  [0603]  150.88,50.67 90 top
R133  1k  [0603]  168.66,54.61 0 top
R134  750K  [0603]  177.8,47.37 270 top
R135  100k  [0603]  176.66,50.67 270 top
R136  DNP  [0603]  181.86,52.07 90 top
R137  4.7k  [0603]  175.26,50.67 270 top
R138  10k  [0603]  172.97,50.67 90 top
R139  1k  [0603]  190.75,54.61 0 top
R140  750K  [0603]  199.9,47.37 270 top
R141  100k  [0603]  198.75,50.67 270 top
R142  DNP  [0603]  203.96,52.07 90 top
R143  4.7k  [0603]  197.36,50.67 270 top
R144  10k  [0603]  195.07,50.67 90 top
R145  1k  [0603]  212.85,54.61 0 top
R146  750K  [0603]  222,47.37 270 top
R147  100k  [0603]  220.85,50.67 270 top
R148  DNP  [0603]  226.06,52.07 90 top
R149  4.7k  [0603]  219.46,50.67 270 top
R150  10k  [0603]  217.17,50.67 90 top
R151  1k  [0603]  124.46,86.87 0 top
R152  750K  [0603]  133.6,79.63 270 top
R153  100k  [0603]  132.46,82.93 270 top
R154  DNP  [0603]  137.67,84.33 90 top
R155  4.7k  [0603]  131.06,82.93 270 top
R156  10k  [0603]  128.78,82.93 90 top
R157  1k  [0603]  146.56,86.87 0 top
R158  750K  [0603]  155.7,79.63 270 top
R159  100k  [0603]  154.56,82.93 270 top
R160  DNP  [0603]  159.77,84.33 90 top
R161  4.7k  [0603]  153.16,82.93 270 top
R162  10k  [0603]  150.88,82.93 90 top
R163  1k  [0603]  168.66,86.87 0 top
R164  750K  [0603]  177.8,79.63 270 top
R165  100k  [0603]  176.66,82.93 270 top
R166  DNP  [0603]  181.86,84.33 90 top
R167  4.7k  [0603]  175.26,82.93 270 top
R168  10k  [0603]  172.97,82.93 90 top
R169  1k  [0603]  190.75,86.87 0 top
R170  750K  [0603]  199.9,79.63 270 top
R171  100k  [0603]  198.75,82.93 270 top
R172  DNP  [0603]  203.96,84.33 90 top
R173  4.7k  [0603]  197.36,82.93 270 top
R174  10k  [0603]  195.07,82.93 90 top
R175  1k  [0603]  212.85,86.87 0 top
R176  750K  [0603]  222,79.63 270 top
R177  100k  [0603]  220.85,82.93 270 top
R178  DNP  [0603]  226.06,84.33 90 top
R179  4.7k  [0603]  219.46,82.93 270 top
R180  10k  [0603]  217.17,82.93 90 top
RPROG  2.0k  [0603]  20.45,24.13 90 top
RPROG1  2.0k  [0603]  42.55,24.13 90 top
RPROG2  2.0k  [0603]  64.64,24.13 90 top
RPROG3  2.0k  [0603]  86.74,24.13 90 top
RPROG4  2.0k  [0603]  108.84,24.13 90 top
RPROG5  2.0k  [0603]  20.45,56.39 90 top
RPROG6  2.0k  [0603]  42.55,56.39 90 top
RPROG7  2.0k  [0603]  64.64,56.39 90 top
RPROG8  2.0k  [0603]  86.74,56.39 90 top
RPROG9  2.0k  [0603]  108.84,56.39 90 top
RPROG10  2.0k  [0603]  20.45,88.65 90 top
RPROG11  2.0k  [0603]  42.55,88.65 90 top
RPROG12  2.0k  [0603]  64.64,88.65 90 top
RPROG13  2.0k  [0603]  86.74,88.65 90 top
RPROG14  2.0k  [0603]  108.84,88.65 90 top
RPROG15  2.0k  [0603]  130.94,24.13 90 top
RPROG16  2.0k  [0603]  153.03,24.13 90 top
RPROG17  2.0k  [0603]  175.13,24.13 90 top
RPROG18  2.0k  [0603]  197.23,24.13 90 top
RPROG19  2.0k  [0603]  219.33,24.13 90 top
RPROG20  2.0k  [0603]  130.94,56.39 90 top
RPROG21  2.0k  [0603]  153.03,56.39 90 top
RPROG22  2.0k  [0603]  175.13,56.39 90 top
RPROG23  2.0k  [0603]  197.23,56.39 90 top
RPROG24  2.0k  [0603]  219.33,56.39 90 top
RPROG25  2.0k  [0603]  130.94,88.65 90 top
RPROG26  2.0k  [0603]  153.03,88.65 90 top
RPROG27  2.0k  [0603]  175.13,88.65 90 top
RPROG28  2.0k  [0603]  197.23,88.65 90 top
RPROG29  2.0k  [0603]  219.33,88.65 90 top
S1  [SWITCH_DPDT_SMD_AYZ0202]  34.04,27.43 270 top
S2  [SWITCH_DPDT_SMD_AYZ0202]  11.94,27.43 270 top
S3  [SWITCH_DPDT_SMD_AYZ0202]  56.13,27.43 270 top
S4  [SWITCH_DPDT_SMD_AYZ0202]  78.23,27.43 270 top
S5  [SWITCH_DPDT_SMD_AYZ0202]  100.33,27.43 270 top
S6  [SWITCH_DPDT_SMD_AYZ0202]  11.94,59.69 270 top
S7  [SWITCH_DPDT_SMD_AYZ0202]  34.04,59.69 270 top
S8  [SWITCH_DPDT_SMD_AYZ0202]  56.13,59.69 270 top
S9  [SWITCH_DPDT_SMD_AYZ0202]  78.23,59.69 270 top
S10  [SWITCH_DPDT_SMD_AYZ0202]  100.33,59.69 270 top
S11  [SWITCH_DPDT_SMD_AYZ0202]  11.94,91.95 270 top
S12  [SWITCH_DPDT_SMD_AYZ0202]  34.04,91.95 270 top
S13  [SWITCH_DPDT_SMD_AYZ0202]  56.13,91.95 270 top
S14  [SWITCH_DPDT_SMD_AYZ0202]  78.23,91.95 270 top
S15  [SWITCH_DPDT_SMD_AYZ0202]  100.33,91.95 270 top
S16  [SWITCH_DPDT_SMD_AYZ0202]  122.43,27.43 270 top
S17  [SWITCH_DPDT_SMD_AYZ0202]  144.53,27.43 270 top
S18  [SWITCH_DPDT_SMD_AYZ0202]  166.62,27.43 270 top
S19  [SWITCH_DPDT_SMD_AYZ0202]  188.72,27.43 270 top
S20  [SWITCH_DPDT_SMD_AYZ0202]  210.82,27.43 270 top
S21  [SWITCH_DPDT_SMD_AYZ0202]  122.43,59.69 270 top
S22  [SWITCH_DPDT_SMD_AYZ0202]  144.53,59.69 270 top
S23  [SWITCH_DPDT_SMD_AYZ0202]  166.62,59.69 270 top
S24  [SWITCH_DPDT_SMD_AYZ0202]  188.72,59.69 270 top
S25  [SWITCH_DPDT_SMD_AYZ0202]  210.82,59.69 270 top
S26  [SWITCH_DPDT_SMD_AYZ0202]  122.43,91.95 270 top
S27  [SWITCH_DPDT_SMD_AYZ0202]  144.53,91.95 270 top
S28  [SWITCH_DPDT_SMD_AYZ0202]  166.62,91.95 270 top
S29  [SWITCH_DPDT_SMD_AYZ0202]  188.72,91.95 270 top
S30  [SWITCH_DPDT_SMD_AYZ0202]  210.82,91.95 270 top
TP1  TEST-POINT3  [PAD.03X.03]  12.19,23.62 0 bottom
TP2  TEST-POINT3  [PAD.03X.03]  34.29,23.62 0 bottom
TP3  TEST-POINT3  [PAD.03X.03]  56.39,23.62 0 bottom
TP4  TEST-POINT3  [PAD.03X.03]  78.49,23.62 0 bottom
TP5  TEST-POINT3  [PAD.03X.03]  100.58,23.62 0 bottom
TP6  TEST-POINT3  [PAD.03X.03]  12.19,55.88 0 bottom
TP7  TEST-POINT3  [PAD.03X.03]  34.29,55.88 0 bottom
TP8  TEST-POINT3  [PAD.03X.03]  56.39,55.88 0 bottom
TP9  TEST-POINT3  [PAD.03X.03]  78.49,55.88 0 bottom
TP10  TEST-POINT3  [PAD.03X.03]  100.58,55.88 0 bottom
TP11  TEST-POINT3  [PAD.03X.03]  12.19,88.14 0 bottom
TP12  TEST-POINT3  [PAD.03X.03]  34.29,88.14 0 bottom
TP13  TEST-POINT3  [PAD.03X.03]  56.39,88.14 0 bottom
TP14  TEST-POINT3  [PAD.03X.03]  78.49,88.14 0 bottom
TP15  TEST-POINT3  [PAD.03X.03]  100.58,88.14 0 bottom
TP16  TEST-POINT3  [PAD.03X.03]  122.68,23.62 0 bottom
TP17  TEST-POINT3  [PAD.03X.03]  144.78,23.62 0 bottom
TP18  TEST-POINT3  [PAD.03X.03]  166.88,23.62 0 bottom
TP19  TEST-POINT3  [PAD.03X.03]  188.98,23.62 0 bottom
TP20  TEST-POINT3  [PAD.03X.03]  211.07,23.62 0 bottom
TP21  TEST-POINT3  [PAD.03X.03]  122.68,55.88 0 bottom
TP22  TEST-POINT3  [PAD.03X.03]  144.78,55.88 0 bottom
TP23  TEST-POINT3  [PAD.03X.03]  166.88,55.88 0 bottom
TP24  TEST-POINT3  [PAD.03X.03]  188.98,55.88 0 bottom
TP25  TEST-POINT3  [PAD.03X.03]  211.07,55.88 0 bottom
TP26  TEST-POINT3  [PAD.03X.03]  122.68,88.14 0 bottom
TP27  TEST-POINT3  [PAD.03X.03]  144.78,88.14 0 bottom